# EAGLE board arpie_cv_tab (EAGLE 9.3.0)
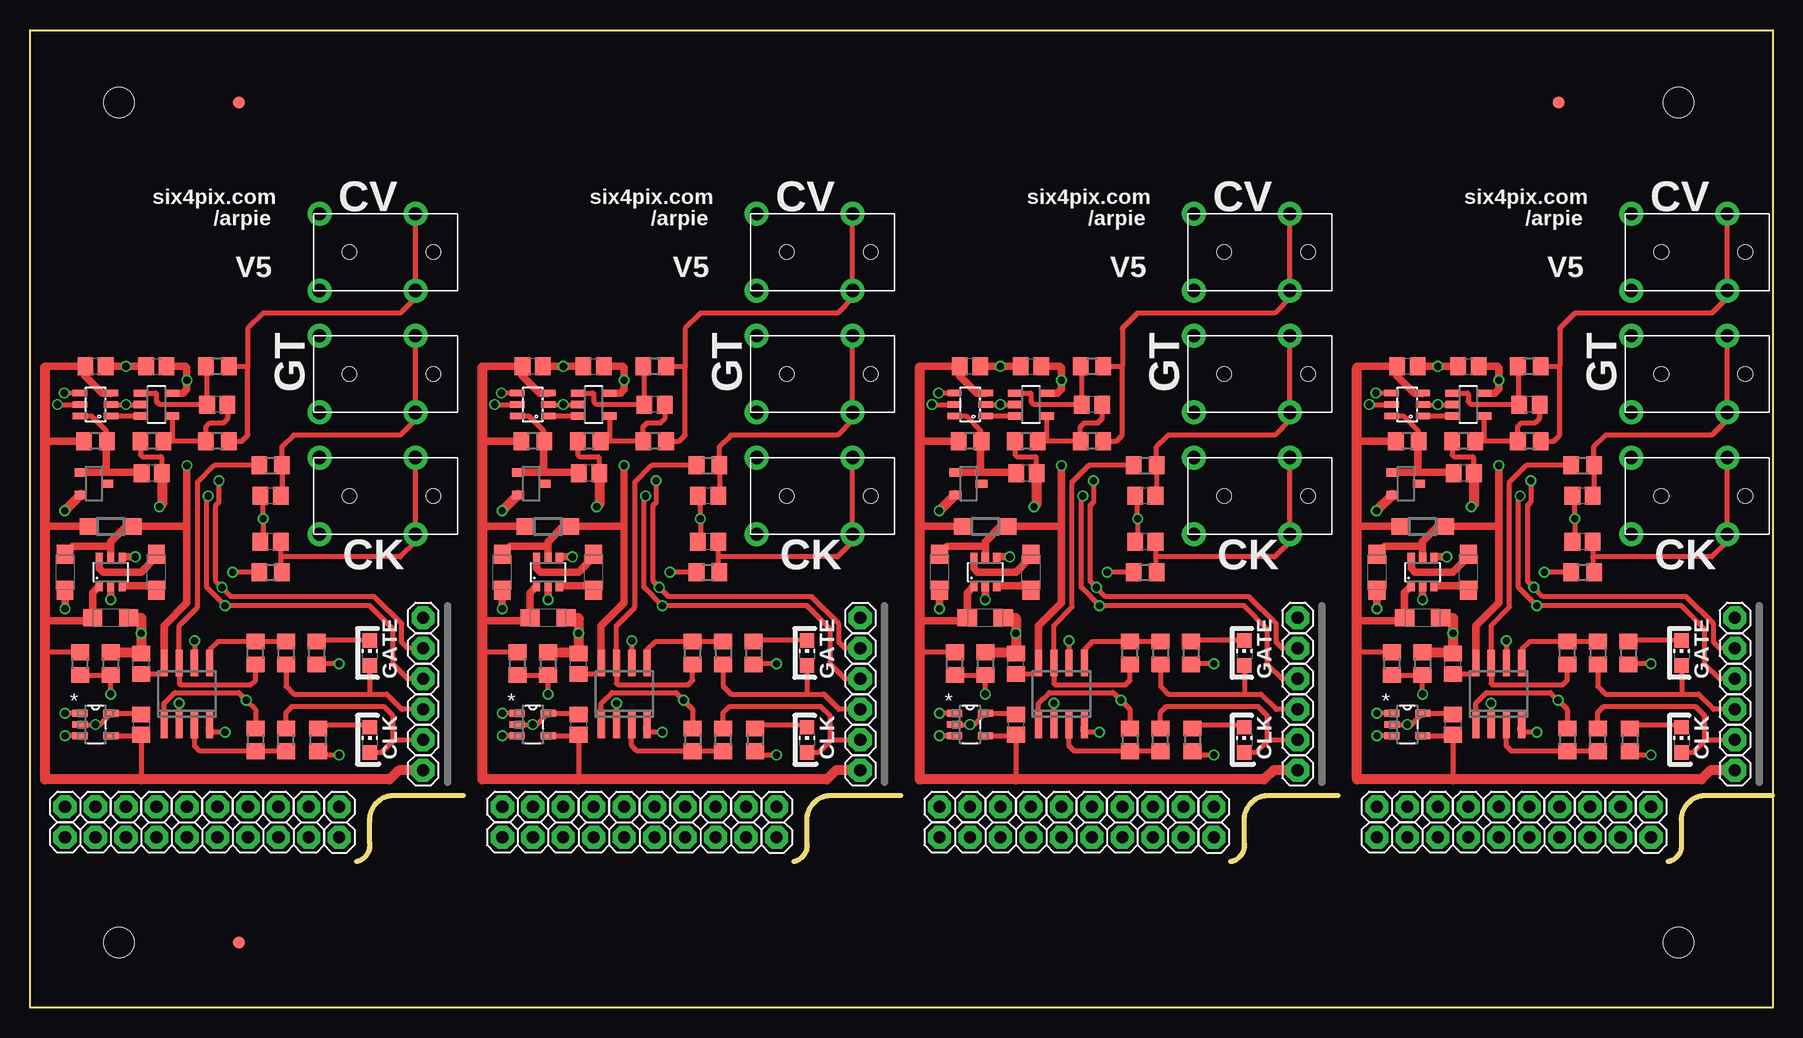
[diagram p0: board, top side]
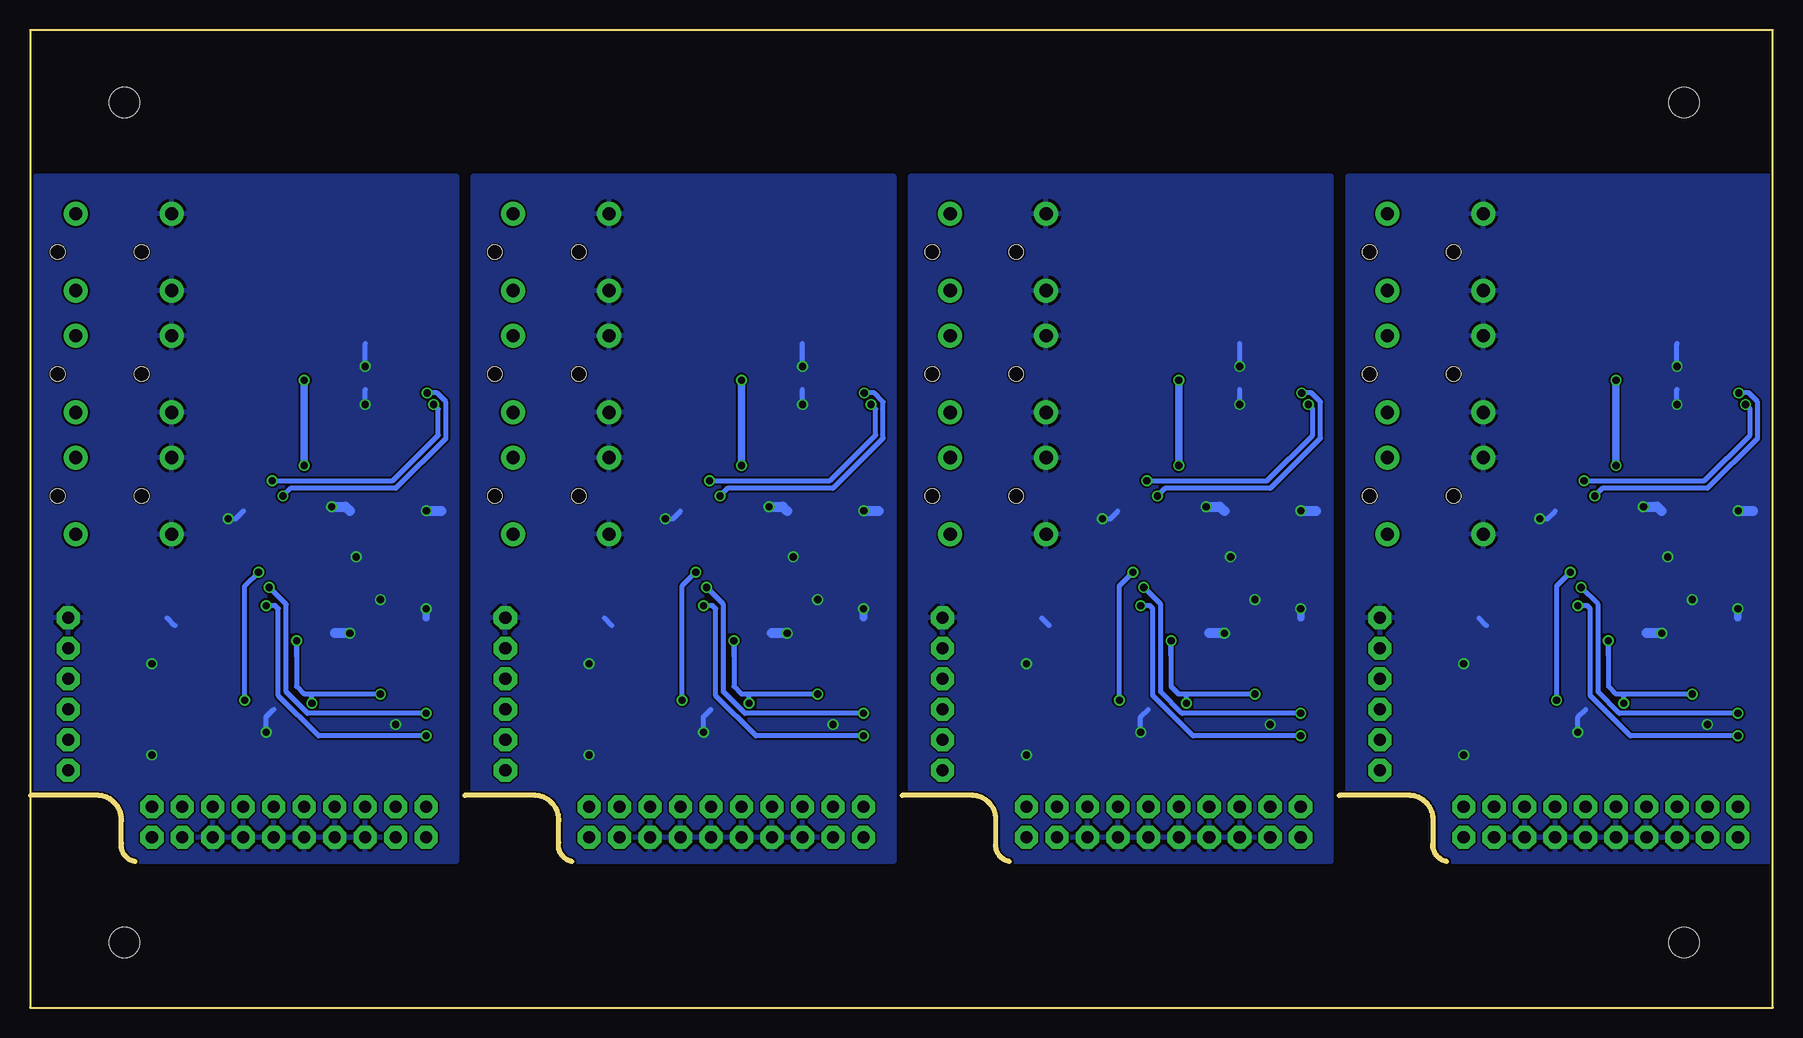
[diagram p1: board, bottom side, seen from below]

Size 145.29 x 81.47 mm. Coordinates in mm from the lower left corner, seen from the top.
Outline: 36.14,17.7 30.25,17.7 arc90 28.32,15.54 28.32,13.76 arc-90 27.2,12.18
Outline: 72.59,17.7 66.7,17.7 arc90 64.77,15.54 64.77,13.76 arc-90 63.65,12.18
Outline: 109.04,17.7 103.15,17.7 arc90 101.22,15.54 101.22,13.76 arc-90 100.1,12.18
Outline: 145.24,17.7 139.6,17.7 arc90 137.67,15.54 137.67,13.76 arc-90 136.55,12.18
Outline: 0,81.47 145.29,81.47 145.29,0 0,0 0,81.47
Copper layers (1*16): Top 0.035mm / dielectric 1.5mm / Bottom 0.035mm
Design rules "hackvana": minimum track width 6mil, minimum drill 0.3mm, track to track 6mil, track to pad 9mil, pad to pad 6mil, via to via 6mil, smd to smd 0mil, copper to edge 6mil, drill to drill 6mil, minimum pad ring 10mil, minimum via ring 6mil, stop-mask expansion 2mil, vias tented up to drill 100mil, thermal gap 10mil
Holes 2.5 mm at 7.42,5.43 137.42,5.43 7.42,75.43 137.42,75.43

## Footprints (pad centres in the part's own frame; a part is rotated, then mirrored left to right if it is on the bottom)
C0805 = smd 1.3 x 1.5: 1 -0.85,0; 2 0.85,0
SMC_A = smd 1.6 x 1.4: + -1.5,0; - 1.5,0
1X01 = drill 1.016 pad 1.93 octagon: 1 0,0
CHIP-LED0805 = smd 1.2 x 1.2: A 0,-1.05; C 0,1.05
3_5MM_PTH_MICRO = drill 1.1 pad 2: 1 3.2,-8; 2 -3.2,0; 2A 3.2,0; 3 -3.2,-8 | hole 1.2: 0,1.5; 0,-5.5
SOD123 = smd 1.4 x 1.4: A 1.9,0; C -1.9,0
FIDUCIAL_1MM = smd 1 x 1: 1 0,0
SOT23-6 = smd 0.55 x 1.2: 1 -0.95,-1.3; 2 0,-1.3; 3 0.95,-1.3; 4 0.95,1.3; 5 0,1.3; 6 -0.95,1.3
SOT23-5 = smd 0.6 x 1.2: 1 -0.95,-1.306; 2 0,-1.306; 3 0.95,-1.306; 4 0.95,1.306; 5 -0.95,1.306
SOT23-6' = smd 0.6 x 0.9: 1 -0.95,-1.15; 2 0,-1.15; 3 0.95,-1.15; 4 0.95,1.15; 5 0,1.15; 6 -0.95,1.15
SO08 = smd 0.6 x 2.2: 1 -1.905,-2.6; 2 -0.635,-2.6; 3 0.635,-2.6; 4 1.905,-2.6; 5 1.905,2.6; 6 0.635,2.6; 7 -0.635,2.6; 8 -1.905,2.6
DBZ_R-PDSO-G3 = smd 0.7 x 1: 1 -0.95,-1.1; 2 0.95,-1.1; 3 0,1.1
SOT95P290X145-5N = smd 1.27 x 0.559: 1 -1.295,0.94; 2 -1.295,0; 3 -1.295,-0.94; 4 1.295,-0.94; 5 1.295,0.94
R0805 = smd 1.3 x 1.5: 1 -0.95,0; 2 0.95,0

## Placement (x,y rotation side)
C1  [C0805]  5.46,53.44 180 top
C2  [C0805]  10.54,53.44 0 top
C3  [C0805]  15.62,50.26 180 top
C4  [C0805]  20.07,42.64 180 top
C5  [C0805]  20.07,38.83 180 top
C6  [SMC_A]  2.92,36.29 270 top
C7  10u  [SMC_A]  6.73,32.48 0 top
C8  10u  [SMC_A]  10.54,36.29 270 top
C9  [C0805]  10.16,44.55 180 top
C10  [C0805]  9.27,28.67 90 top
C11  [C0805]  56.51,38.83 180 top
C12  [C0805]  9.27,23.59 270 top
C13  [C0805]  56.51,42.64 180 top
C14  [C0805]  41.91,53.44 180 top
C15  [C0805]  46.99,53.44 0 top
C16  [C0805]  52.07,50.26 180 top
C17  10u  [SMC_A]  46.99,36.29 270 top
C18  [SMC_A]  39.37,36.29 270 top
C19  10u  [SMC_A]  43.18,32.48 0 top
C20  [C0805]  45.72,28.67 90 top
C21  [C0805]  46.61,44.55 180 top
C22  [C0805]  45.72,23.59 270 top
C23  [C0805]  92.96,38.83 180 top
C24  [C0805]  92.96,42.64 180 top
C25  [C0805]  78.36,53.44 180 top
C26  [C0805]  83.44,53.44 0 top
C27  [C0805]  88.52,50.26 180 top
C28  10u  [SMC_A]  83.44,36.29 270 top
C29  [SMC_A]  75.82,36.29 270 top
C30  10u  [SMC_A]  79.63,32.48 0 top
C31  [C0805]  82.17,28.67 90 top
C32  [C0805]  83.06,44.55 180 top
C33  [C0805]  82.17,23.59 270 top
C34  [C0805]  129.41,38.83 180 top
C35  [C0805]  129.41,42.64 180 top
C36  [C0805]  114.81,53.44 180 top
C37  [C0805]  119.89,53.44 0 top
C38  [C0805]  124.97,50.26 180 top
C39  10u  [SMC_A]  119.89,36.29 270 top
C40  [SMC_A]  112.27,36.29 270 top
C41  10u  [SMC_A]  116.08,32.48 0 top
C42  [C0805]  118.62,28.67 90 top
C43  [C0805]  119.51,44.55 180 top
C44  [C0805]  118.62,23.59 270 top
CLK  [1X01]  2.92,16.73 0 top
CLK1  [1X01]  39.37,16.73 0 top
CLK2  [1X01]  75.82,16.73 0 top
CLK3  [1X01]  112.27,16.73 0 top
CLK_LED  [CHIP-LED0805]  28.32,22.32 0 top
CLK_LED1  [CHIP-LED0805]  64.77,22.32 0 top
CLK_LED2  [CHIP-LED0805]  101.22,22.32 0 top
CLK_LED3  [CHIP-LED0805]  137.67,22.32 0 top
CLKOUT  3_5MM_PTH_MICRO  [3_5MM_PTH_MICRO]  32.13,42.64 270 top
CLKOUT1  3_5MM_PTH_MICRO  [3_5MM_PTH_MICRO]  68.58,42.64 270 top
CLKOUT2  3_5MM_PTH_MICRO  [3_5MM_PTH_MICRO]  105.03,42.64 270 top
CLKOUT3  3_5MM_PTH_MICRO  [3_5MM_PTH_MICRO]  141.48,42.64 270 top
CVOUT  3_5MM_PTH_MICRO  [3_5MM_PTH_MICRO]  32.13,62.96 270 top
CVOUT1  3_5MM_PTH_MICRO  [3_5MM_PTH_MICRO]  68.58,62.96 270 top
CVOUT2  3_5MM_PTH_MICRO  [3_5MM_PTH_MICRO]  105.03,62.96 270 top
CVOUT3  3_5MM_PTH_MICRO  [3_5MM_PTH_MICRO]  141.48,62.96 270 top
D1  MBR0520LT  [SOD123]  6.73,40.1 180 top
D2  MBR0520LT  [SOD123]  43.18,40.1 180 top
D3  MBR0520LT  [SOD123]  79.63,40.1 180 top
D4  MBR0520LT  [SOD123]  116.08,40.1 180 top
DAT  [1X01]  5.46,16.73 0 top
DAT1  [1X01]  41.91,16.73 0 top
DAT2  [1X01]  78.36,16.73 0 top
DAT3  [1X01]  114.81,16.73 0 top
E$1  [FIDUCIAL_1MM]  17.42,75.43 0 top
E$2  [FIDUCIAL_1MM]  127.42,75.43 0 top
E$3  [FIDUCIAL_1MM]  17.42,5.43 0 top
ENA  [1X01]  20.7,16.73 90 top
ENA1  [1X01]  57.15,16.73 90 top
ENA2  [1X01]  93.6,16.73 90 top
ENA3  [1X01]  130.05,16.73 90 top
GATE_LED  [CHIP-LED0805]  28.32,29.56 0 top
GATE_LED1  [CHIP-LED0805]  64.77,29.56 0 top
GATE_LED2  [CHIP-LED0805]  101.22,29.56 0 top
GATE_LED3  [CHIP-LED0805]  137.67,29.56 0 top
GATEOUT  3_5MM_PTH_MICRO  [3_5MM_PTH_MICRO]  32.13,52.8 270 top
GATEOUT1  3_5MM_PTH_MICRO  [3_5MM_PTH_MICRO]  68.58,52.8 270 top
GATEOUT2  3_5MM_PTH_MICRO  [3_5MM_PTH_MICRO]  105.03,52.8 270 top
GATEOUT3  3_5MM_PTH_MICRO  [3_5MM_PTH_MICRO]  141.48,52.8 270 top
GND  [1X01]  32.77,32.48 0 top
GND1  [1X01]  8,14.19 0 top
GND2  [1X01]  10.54,14.19 0 top
GND3  [1X01]  13.08,14.19 0 top
GND4  [1X01]  15.62,14.19 0 top
GND5  [1X01]  18.16,14.19 0 top
GND6  [1X01]  20.7,14.19 0 top
GND7  [1X01]  54.61,14.19 0 top
GND8  [1X01]  57.15,14.19 0 top
GND9  [1X01]  46.99,14.19 0 top
GND10  [1X01]  49.53,14.19 0 top
GND11  [1X01]  52.07,14.19 0 top
GND12  [1X01]  44.45,14.19 0 top
GND13  [1X01]  69.22,32.48 0 top
GND14  [1X01]  91.06,14.19 0 top
GND15  [1X01]  93.6,14.19 0 top
GND16  [1X01]  83.44,14.19 0 top
GND17  [1X01]  85.98,14.19 0 top
GND18  [1X01]  88.52,14.19 0 top
GND19  [1X01]  80.9,14.19 0 top
GND20  [1X01]  105.66,32.48 0 top
GND21  [1X01]  127.51,14.19 0 top
GND22  [1X01]  130.05,14.19 0 top
GND23  [1X01]  119.89,14.19 0 top
GND24  [1X01]  122.43,14.19 0 top
GND25  [1X01]  124.97,14.19 0 top
GND26  [1X01]  117.35,14.19 0 top
GND27  [1X01]  142.11,32.48 0 top
IC1  MCP4726  [SOT23-6]  5.46,50.26 90 top
IC2  MCP601OT  [SOT23-5]  10.54,50.26 270 top
IC3  LM27675M5_CHARGEPUMP  [SOT23-6']  6.73,36.29 0 top
IC4  LM358D  [SO08]  13.08,26.13 0 top
IC5  LM4041A12DBZ  [DBZ_R-PDSO-G3]  5.33,43.66 270 top
IC6  24LC_16BT-I/OT  [SOT95P290X145-5N]  5.46,23.59 0 top
IC7  MCP4726  [SOT23-6]  41.91,50.26 90 top
IC8  MCP601OT  [SOT23-5]  46.99,50.26 270 top
IC9  LM27675M5_CHARGEPUMP  [SOT23-6']  43.18,36.29 0 top
IC10  LM358D  [SO08]  49.53,26.13 0 top
IC11  LM4041A12DBZ  [DBZ_R-PDSO-G3]  41.78,43.66 270 top
IC12  24LC_16BT-I/OT  [SOT95P290X145-5N]  41.91,23.59 0 top
IC13  MCP4726  [SOT23-6]  78.36,50.26 90 top
IC14  MCP601OT  [SOT23-5]  83.44,50.26 270 top
IC15  LM27675M5_CHARGEPUMP  [SOT23-6']  79.63,36.29 0 top
IC16  LM358D  [SO08]  85.98,26.13 0 top
IC17  LM4041A12DBZ  [DBZ_R-PDSO-G3]  78.23,43.66 270 top
IC18  24LC_16BT-I/OT  [SOT95P290X145-5N]  78.36,23.59 0 top
IC19  MCP4726  [SOT23-6]  114.81,50.26 90 top
IC20  MCP601OT  [SOT23-5]  119.89,50.26 270 top
IC21  LM27675M5_CHARGEPUMP  [SOT23-6']  116.08,36.29 0 top
IC22  LM358D  [SO08]  122.43,26.13 0 top
IC23  LM4041A12DBZ  [DBZ_R-PDSO-G3]  114.68,43.66 270 top
IC24  24LC_16BT-I/OT  [SOT95P290X145-5N]  114.81,23.59 0 top
KS1  [1X01]  8,16.73 90 top
KS2  [1X01]  25.78,16.73 90 top
KS3  [1X01]  62.23,16.73 90 top
KS4  [1X01]  44.45,16.73 90 top
KS5  [1X01]  98.68,16.73 90 top
KS6  [1X01]  80.9,16.73 90 top
KS7  [1X01]  135.13,16.73 90 top
KS8  [1X01]  117.35,16.73 90 top
LD1  [1X01]  10.54,16.73 90 top
LD2  [1X01]  13.08,16.73 90 top
LD3  [1X01]  15.62,16.73 90 top
LD4  [1X01]  18.16,16.73 90 top
LD5  [1X01]  52.07,16.73 90 top
LD6  [1X01]  49.53,16.73 90 top
LD7  [1X01]  46.99,16.73 90 top
LD8  [1X01]  54.61,16.73 90 top
LD9  [1X01]  88.52,16.73 90 top
LD10  [1X01]  85.98,16.73 90 top
LD11  [1X01]  83.44,16.73 90 top
LD12  [1X01]  91.06,16.73 90 top
LD13  [1X01]  124.97,16.73 90 top
LD14  [1X01]  122.43,16.73 90 top
LD15  [1X01]  119.89,16.73 90 top
LD16  [1X01]  127.51,16.73 90 top
PB1  [1X01]  69.22,22.32 0 top
PB2  [1X01]  105.66,22.32 0 top
PB3  [1X01]  32.77,22.32 0 top
PB4  [1X01]  142.11,22.32 0 top
PC0  [1X01]  32.77,24.86 0 top
PC1  [1X01]  69.22,29.94 0 top
PC2  [1X01]  69.22,27.4 0 top
PC3  [1X01]  69.22,24.86 0 top
PC4  [1X01]  32.77,27.4 0 top
PC5  [1X01]  32.77,29.94 0 top
PC6  [1X01]  105.66,29.94 0 top
PC7  [1X01]  105.66,27.4 0 top
PC8  [1X01]  105.66,24.86 0 top
PC9  [1X01]  142.11,29.94 0 top
PC10  [1X01]  142.11,27.4 0 top
PC11  [1X01]  142.11,24.86 0 top
R1  [R0805]  15.62,53.44 180 top
R2  [R0805]  10.16,47.21 180 top
R3  [R0805]  15.62,47.21 180 top
R4  1k  [R0805]  20.07,45.18 0 top
R5  1k  [R0805]  20.07,36.29 0 top
R6  47k  [R0805]  4.19,28.67 90 top
R7  47k  [R0805]  6.73,28.67 270 top
R8  2m2  [R0805]  18.8,29.56 90 top
R9  100k  [R0805]  21.34,29.56 270 top
R10  1K  [R0805]  23.88,29.56 270 top
R11  2m2  [R0805]  18.8,22.32 270 top
R12  100k  [R0805]  21.34,22.32 90 top
R13  1K  [R0805]  24,22.32 270 top
R14  3k  [R0805]  5.46,47.21 180 top
R15  1K  [R0805]  60.32,29.56 270 top
R16  1K  [R0805]  60.45,22.32 270 top
R17  1k  [R0805]  56.51,36.29 0 top
R18  1k  [R0805]  56.51,45.18 0 top
R19  [R0805]  52.07,53.44 180 top
R20  [R0805]  52.07,47.21 180 top
R21  [R0805]  46.61,47.21 180 top
R22  47k  [R0805]  43.18,28.67 270 top
R23  47k  [R0805]  40.64,28.67 90 top
R24  100k  [R0805]  57.79,22.32 90 top
R25  100k  [R0805]  57.79,29.56 270 top
R26  2m2  [R0805]  55.24,29.56 90 top
R27  2m2  [R0805]  55.24,22.32 270 top
R28  3k  [R0805]  41.91,47.21 180 top
R29  1K  [R0805]  96.77,29.56 270 top
R30  1K  [R0805]  96.9,22.32 270 top
R31  1k  [R0805]  92.96,36.29 0 top
R32  1k  [R0805]  92.96,45.18 0 top
R33  [R0805]  88.52,53.44 180 top
R34  [R0805]  88.52,47.21 180 top
R35  [R0805]  83.06,47.21 180 top
R36  47k  [R0805]  79.63,28.67 270 top
R37  47k  [R0805]  77.09,28.67 90 top
R38  100k  [R0805]  94.23,22.32 90 top
R39  100k  [R0805]  94.23,29.56 270 top
R40  2m2  [R0805]  91.69,29.56 90 top
R41  2m2  [R0805]  91.69,22.32 270 top
R42  3k  [R0805]  78.36,47.21 180 top
R43  1K  [R0805]  133.22,29.56 270 top
R44  1K  [R0805]  133.35,22.32 270 top
R45  1k  [R0805]  129.41,36.29 0 top
R46  1k  [R0805]  129.41,45.18 0 top
R47  [R0805]  124.97,53.44 180 top
R48  [R0805]  124.97,47.21 180 top
R49  [R0805]  119.51,47.21 180 top
R50  47k  [R0805]  116.08,28.67 270 top
R51  47k  [R0805]  113.54,28.67 90 top
R52  100k  [R0805]  130.68,22.32 90 top
R53  100k  [R0805]  130.68,29.56 270 top
R54  2m2  [R0805]  128.14,29.56 90 top
R55  2m2  [R0805]  128.14,22.32 270 top
R56  3k  [R0805]  114.81,47.21 180 top
SW1  [1X01]  23.24,16.73 90 top
SW2  [1X01]  59.69,16.73 90 top
SW3  [1X01]  96.14,16.73 90 top
SW4  [1X01]  132.59,16.73 90 top
UN1  [1X01]  23.24,14.19 0 top
UN2  [1X01]  25.78,14.19 90 top
UN3  [1X01]  62.23,14.19 90 top
UN4  [1X01]  59.69,14.19 0 top
UN5  [1X01]  98.68,14.19 90 top
UN6  [1X01]  96.14,14.19 0 top
UN7  [1X01]  135.13,14.19 90 top
UN8  [1X01]  132.59,14.19 0 top
VCC  [1X01]  32.77,19.78 0 top
VCC1  [1X01]  2.92,14.19 0 top
VCC2  [1X01]  5.46,14.19 0 top
VCC3  [1X01]  39.37,14.19 0 top
VCC4  [1X01]  41.91,14.19 0 top
VCC5  [1X01]  69.22,19.78 0 top
VCC6  [1X01]  75.82,14.19 0 top
VCC7  [1X01]  78.36,14.19 0 top
VCC8  [1X01]  105.66,19.78 0 top
VCC9  [1X01]  112.27,14.19 0 top
VCC10  [1X01]  114.81,14.19 0 top
VCC11  [1X01]  142.11,19.78 0 top

## Library data of the parts
C1-C5 C9-C16 C20-C27 C31-C38 C42-C44 = resistor
C6-C8 C17-C19 C28-C30 C39-C41 R1-R56 = rcl
CLK CLK1-CLK3 DAT DAT1-DAT3 E$1-E$3 ENA ENA1-ENA3 GND GND1-GND27 KS1-KS8 LD1-LD16 PB1-PB4 PC0 PC1-PC11 SW1-SW4 UN1-UN8 VCC VCC1-VCC11 = adafruit
CLK_LED CLK_LED1-CLK_LED3 GATE_LED GATE_LED1-GATE_LED3 = led
CLKOUT CLKOUT1-CLKOUT3 CVOUT CVOUT1-CVOUT3 GATEOUT GATEOUT1-GATEOUT3 IC3 IC9 IC15 IC21 = jason_eagle6
D1-D4 = diode
IC1 IC7 IC13 IC19 = jasons_stuff
IC2 IC4 IC8 IC10 IC14 IC16 IC20 IC22 = linear
IC5 IC11 IC17 IC23 = texas; MPN: LM4041A12IDBZR; OC_FARNELL: 1407949; OC_NEWARK: 58K5875
IC6 IC12 IC18 IC24 = Microchip-24LCxxx; MPN: 24LC16BT-I/OT; OC_FARNELL: 9757961; OC_NEWARK: 62K0580; PACKAGE: SOT-23-5; SUPPLIER: MICROCHIP

## Nets
+5V: C1.2 C7.+ C12.2 D1.A IC1.3 IC3.1 IC6.4 R6.2 R14.2 VCC.1
+5V1: C14.2 C19.+ C22.2 D2.A IC7.3 IC9.1 IC12.4 R23.2 R28.2 VCC5.1
+5V2: C25.2 C30.+ C33.2 D3.A IC13.3 IC15.1 IC18.4 R37.2 R42.2 VCC8.1
+5V3: C36.2 C41.+ C44.2 D4.A IC19.3 IC21.1 IC24.4 R51.2 R56.2 VCC11.1
+10V: C2.2 C6.+ C10.1 D1.C IC2.5 IC3.5 IC4.8
+10V1: C15.2 C18.+ C20.1 D2.C IC8.5 IC9.5 IC10.8
+10V2: C26.2 C29.+ C31.1 D3.C IC14.5 IC15.5 IC16.8
+10V3: C37.2 C40.+ C42.1 D4.C IC20.5 IC21.5 IC22.8
CLK_OUT: CLK_LED.A PB3.1 R12.2
CLK_OUT1: CLK_LED1.A PB1.1 R24.2
CLK_OUT2: CLK_LED2.A PB2.1 R38.2
CLK_OUT3: CLK_LED3.A PB4.1 R52.2
CVOUT: CVOUT.2 CVOUT.2A R1.1 R3.1
CVOUT1: CVOUT1.2 CVOUT1.2A R19.1 R20.1
CVOUT2: CVOUT2.2 CVOUT2.2A R33.1 R34.1
CVOUT3: CVOUT3.2 CVOUT3.2A R47.1 R48.1
DACOUT: IC1.1 IC2.3
DACOUT1: IC7.1 IC8.3
DACOUT2: IC13.1 IC14.3
DACOUT3: IC19.1 IC20.3
GATE_OUT: GATE_LED.A PC0.1 R9.2
GATE_OUT1: GATE_LED1.A PC3.1 R25.2
GATE_OUT2: GATE_LED2.A PC8.1 R39.2
GATE_OUT3: GATE_LED3.A PC11.1 R53.2
GND: C1.1 C2.1 C4.2 C5.2 C6.- C7.- C9.1 C10.2 C12.1 CLKOUT.1 CLKOUT.3 CVOUT.1 CVOUT.3 GATEOUT.1 GATEOUT.3 GND1.1 GND2.1 GND3.1 GND4.1 GND5.1 GND6.1 GND.1 IC1.2 IC2.2 IC3.2 IC3.4 IC4.4 IC5.2 IC6.2 IC6.5 R2.2 R7.1 R10.2 R13.2
GND1: C11.2 C13.2 C14.1 C15.1 C18.- C19.- C20.2 C21.1 C22.1 CLKOUT1.1 CLKOUT1.3 CVOUT1.1 CVOUT1.3 GATEOUT1.1 GATEOUT1.3 GND7.1 GND8.1 GND9.1 GND10.1 GND11.1 GND12.1 GND13.1 IC7.2 IC8.2 IC9.2 IC9.4 IC10.4 IC11.2 IC12.2 IC12.5 R15.2 R16.2 R21.2 R22.1
GND2: C23.2 C24.2 C25.1 C26.1 C29.- C30.- C31.2 C32.1 C33.1 CLKOUT2.1 CLKOUT2.3 CVOUT2.1 CVOUT2.3 GATEOUT2.1 GATEOUT2.3 GND14.1 GND15.1 GND16.1 GND17.1 GND18.1 GND19.1 GND20.1 IC13.2 IC14.2 IC15.2 IC15.4 IC16.4 IC17.2 IC18.2 IC18.5 R29.2 R30.2 R35.2 R36.1
GND3: C34.2 C35.2 C36.1 C37.1 C40.- C41.- C42.2 C43.1 C44.1 CLKOUT3.1 CLKOUT3.3 CVOUT3.1 CVOUT3.3 GATEOUT3.1 GATEOUT3.3 GND21.1 GND22.1 GND23.1 GND24.1 GND25.1 GND26.1 GND27.1 IC19.2 IC20.2 IC21.2 IC21.4 IC22.4 IC23.2 IC24.2 IC24.5 R43.2 R44.2 R49.2 R50.1
N$1: IC4.2 IC4.6 R6.1 R7.2
N$2: CLK_LED.C R13.1
N$3: GATE_LED.C R10.1
N$4: IC4.3 R11.2 R12.1
N$5: IC4.5 R8.2 R9.1
N$6: C9.2 IC1.6 IC5.1 R14.1
N$7: C11.1 CLKOUT1.2 CLKOUT1.2A R17.2
N$8: C13.1 GATEOUT1.2 GATEOUT1.2A R18.2
N$9: IC4.1 R5.1 R11.1
N$10: IC10.7 R18.1 R26.1
N$11: C3.2 IC2.1 R1.2
N$12: IC4.7 R4.1 R8.1
N$13: IC10.1 R17.1 R27.1
N$14: C16.2 IC8.1 R19.2
N$15: C3.1 IC2.4 R2.1 R3.2
N$16: C16.1 IC8.4 R20.2 R21.1
N$17: C17.+ IC9.6
N$18: C17.- IC9.3
N$19: C5.1 CLKOUT.2 CLKOUT.2A R5.2
N$20: C4.1 GATEOUT.2 GATEOUT.2A R4.2
N$21: IC10.2 IC10.6 R22.2 R23.1
N$22: CLK_LED1.C R16.1
N$23: GATE_LED1.C R15.1
N$24: IC10.3 R24.1 R27.2
N$25: IC10.5 R25.1 R26.2
N$26: C21.2 IC7.6 IC11.1 R28.1
N$27: C23.1 CLKOUT2.2 CLKOUT2.2A R31.2
N$28: C24.1 GATEOUT2.2 GATEOUT2.2A R32.2
N$29: IC16.7 R32.1 R40.1
N$30: IC16.1 R31.1 R41.1
N$31: C27.2 IC14.1 R33.2
N$32: C27.1 IC14.4 R34.2 R35.1
N$33: C28.+ IC15.6
N$34: C28.- IC15.3
N$35: IC16.2 IC16.6 R36.2 R37.1
N$36: CLK_LED2.C R30.1
N$37: GATE_LED2.C R29.1
N$38: C8.+ IC3.6
N$39: C8.- IC3.3
N$40: IC16.3 R38.1 R41.2
N$41: IC16.5 R39.1 R40.2
N$42: C32.2 IC13.6 IC17.1 R42.1
N$43: C34.1 CLKOUT3.2 CLKOUT3.2A R45.2
N$44: C35.1 GATEOUT3.2 GATEOUT3.2A R46.2
N$45: IC22.7 R46.1 R54.1
N$46: IC22.1 R45.1 R55.1
N$47: C38.2 IC20.1 R47.2
N$48: C38.1 IC20.4 R48.2 R49.1
N$49: C39.+ IC21.6
N$50: C39.- IC21.3
N$51: IC22.2 IC22.6 R50.2 R51.1
N$52: CLK_LED3.C R44.1
N$53: GATE_LED3.C R43.1
N$54: IC22.3 R52.1 R55.2
N$55: IC22.5 R53.1 R54.2
N$56: C43.2 IC19.6 IC23.1 R56.1
SCL: IC1.5 IC6.1 PC5.1
SCL1: IC7.5 IC12.1 PC1.1
SCL2: IC13.5 IC18.1 PC6.1
SCL3: IC19.5 IC24.1 PC9.1
SDA: IC1.4 IC6.3 PC4.1
SDA1: IC7.4 IC12.3 PC2.1
SDA2: IC13.4 IC18.3 PC7.1
SDA3: IC19.4 IC24.3 PC10.1

## Tracks (layer width: path | path; a pad name or v marks a point on that pad's centre or on a via)
+5V
  Top 0.406: R6.2 1.27,29.62 1.27,29.94 | IC6.4 9.27,22.65 C12.2 9.27,19.02
  Top 0.61: IC3.1 5.23,34.59 C7.+ 5.23,32.25 1.5,32.25 1.27,32.48 | D1.A 1.27,40.1 | 1.27,47.09 1.4,47.21 R14.2 4.57,47.27 | IC1.3 6.04,51.21 4.57,52.67 4.57,53.4 C1.2 1.37,53.44 1.27,53.33
  Top 0.813: VCC.1 30.73,19.78 29.97,19.02 9.27,19.02 1.27,19.02 1.27,29.94 1.27,32.48 1.27,40.1 1.27,47.09 1.27,53.33
+5V1
  Top 0.406: R23.2 37.72,29.62 37.72,29.94 | IC12.4 45.72,22.65 C22.2 45.72,19.02
  Top 0.61: IC9.1 41.68,34.59 C19.+ 41.68,32.25 37.95,32.25 37.72,32.48 | D2.A 37.72,40.1 | 37.72,47.09 37.85,47.21 R28.2 41.02,47.27 | IC7.3 42.48,51.21 41.02,52.67 41.02,53.4 C14.2 37.82,53.44 37.72,53.33
  Top 0.813: VCC5.1 67.18,19.78 66.42,19.02 45.72,19.02 37.72,19.02 37.72,29.94 37.72,32.48 37.72,40.1 37.72,47.09 37.72,53.33
+5V2
  Top 0.406: R37.2 74.17,29.62 74.17,29.94 | IC18.4 82.17,22.65 C33.2 82.17,19.02
  Top 0.61: IC15.1 78.13,34.59 C30.+ 78.13,32.25 74.4,32.25 74.17,32.48 | D3.A 74.17,40.1 | 74.17,47.09 74.29,47.21 R42.2 77.47,47.27 | IC13.3 78.93,51.21 77.47,52.67 77.47,53.4 C25.2 74.27,53.44 74.17,53.33
  Top 0.813: VCC8.1 103.63,19.78 102.87,19.02 82.17,19.02 74.17,19.02 74.17,29.94 74.17,32.48 74.17,40.1 74.17,47.09 74.17,53.33
+5V3
  Top 0.406: R51.2 110.62,29.62 110.62,29.94 | IC24.4 118.62,22.65 C44.2 118.62,19.02
  Top 0.61: IC21.1 114.58,34.59 C41.+ 114.58,32.25 110.85,32.25 110.62,32.48 | D4.A 110.62,40.1 | 110.62,47.09 110.74,47.21 R56.2 113.92,47.27 | IC19.3 115.38,51.21 113.92,52.67 113.92,53.4 C36.2 110.72,53.44 110.62,53.33
  Top 0.813: VCC11.1 140.08,19.78 139.32,19.02 118.62,19.02 110.62,19.02 110.62,29.94 110.62,32.48 110.62,40.1 110.62,47.09 110.62,53.33
+10V  (via drill 0.6)
  Top 0.406: C10.1 11.09,27.82 11.18,27.91 IC4.8
  Top 0.61: IC3.5 6.73,38.32 | 6.73,38.32 6.6,38.45 3.58,38.45 C6.+ | 6.73,38.32 6.73,38.83 8,40.1 D1.C 13.08,40.1 | 13.08,40.1 13.08,33.75 11.18,31.84 IC4.8 | 13.08,40.1 v13.08,45.18 | C2.2 12.95,53.44 13.08,53.31 13.08,52.8 v13.08,52.29 13.08,51.53 12.76,51.21 IC2.5
  Bottom 0.61: v13.08,45.18 v13.08,52.29
+10V1  (via drill 0.6)
  Top 0.406: C20.1 47.54,27.82 47.62,27.91 IC10.8
  Top 0.61: IC9.5 43.18,38.32 | 43.18,38.32 43.05,38.45 40.03,38.45 C18.+ | 43.18,38.32 43.18,38.83 44.45,40.1 D2.C 49.53,40.1 | 49.53,40.1 49.53,33.75 47.62,31.84 IC10.8 | 49.53,40.1 v49.53,45.18 | C15.2 49.4,53.44 49.53,53.31 49.53,52.8 v49.53,52.29 49.53,51.53 49.21,51.21 IC8.5
  Bottom 0.61: v49.53,45.18 v49.53,52.29
+10V2  (via drill 0.6)
  Top 0.406: C31.1 83.99,27.82 84.07,27.91 IC16.8
  Top 0.61: IC15.5 79.63,38.32 | 79.63,38.32 79.5,38.45 76.48,38.45 C29.+ | 79.63,38.32 79.63,38.83 80.9,40.1 D3.C 85.98,40.1 | 85.98,40.1 85.98,33.75 84.07,31.84 IC16.8 | 85.98,40.1 v85.98,45.18 | C26.2 85.85,53.44 85.98,53.31 85.98,52.8 v85.98,52.29 85.98,51.53 85.66,51.21 IC14.5
  Bottom 0.61: v85.98,45.18 v85.98,52.29
+10V3  (via drill 0.6)
  Top 0.406: C42.1 120.44,27.82 120.52,27.91 IC22.8
  Top 0.61: IC21.5 116.08,38.32 | 116.08,38.32 115.95,38.45 112.93,38.45 C40.+ | 116.08,38.32 116.08,38.83 117.35,40.1 D4.C 122.43,40.1 | 122.43,40.1 122.43,33.75 120.52,31.84 IC22.8 | 122.43,40.1 v122.43,45.18 | C37.2 122.3,53.44 122.43,53.31 122.43,52.8 v122.43,52.29 122.43,51.53 122.11,51.21 IC20.5
  Bottom 0.61: v122.43,45.18 v122.43,52.29
CLK_OUT
  Top 0.406: R12.2 21.34,24.61 21.84,25.11 29.46,25.11 30.23,24.35 30.23,22.32 30.35,22.32 | 30.35,22.32 PB3.1 | 30.35,22.32 29.3,21.27 CLK_LED.A
CLK_OUT1
  Top 0.406: R24.2 57.79,24.61 58.29,25.11 65.91,25.11 66.68,24.35 66.68,22.32 66.8,22.32 | 66.8,22.32 PB1.1 | 66.8,22.32 65.75,21.27 CLK_LED1.A
CLK_OUT2
  Top 0.406: R38.2 94.23,24.61 94.74,25.11 102.36,25.11 103.12,24.35 103.12,22.32 103.25,22.32 | 103.25,22.32 PB2.1 | 103.25,22.32 102.2,21.27 CLK_LED2.A
CLK_OUT3
  Top 0.406: R52.2 130.68,24.61 131.19,25.11 138.81,25.11 139.57,24.35 139.57,22.32 139.7,22.32 | 139.7,22.32 PB4.1 | 139.7,22.32 138.65,21.27 CLK_LED3.A
CVOUT
  Top 0.406: 18.16,53.44 18.16,47.72 17.65,47.21 R3.1 | R1.1 18.16,53.44 | 18.16,53.44 18.16,56.61 19.43,57.88 30.86,57.88 32.13,59.15 CVOUT.2A CVOUT.2
CVOUT1
  Top 0.406: 54.61,53.44 54.61,47.72 54.1,47.21 R20.1 | R19.1 54.61,53.44 | 54.61,53.44 54.61,56.61 55.88,57.88 67.31,57.88 68.58,59.15 CVOUT1.2A CVOUT1.2
CVOUT2
  Top 0.406: 91.06,53.44 91.06,47.72 90.55,47.21 R34.1 | R33.1 91.06,53.44 | 91.06,53.44 91.06,56.61 92.33,57.88 103.76,57.88 105.03,59.15 CVOUT2.2A CVOUT2.2
CVOUT3
  Top 0.406: 127.51,53.44 127.51,47.72 127,47.21 R48.1 | R47.1 127.51,53.44 | 127.51,53.44 127.51,56.61 128.78,57.88 140.21,57.88 141.48,59.15 CVOUT3.2A CVOUT3.2
DACOUT
  Top 0.406: IC1.1 IC2.3
DACOUT1
  Top 0.406: IC7.1 IC8.3
DACOUT2
  Top 0.406: IC13.1 IC14.3
DACOUT3
  Top 0.406: IC19.1 IC20.3
GATE_OUT
  Top 0.406: R9.2 21.34,26.77 21.97,26.13 28.32,26.13 | 28.32,26.13 29.72,26.13 30.99,24.86 PC0.1 | GATE_LED.A 28.32,26.13
GATE_OUT1
  Top 0.406: R25.2 57.79,26.77 58.42,26.13 64.77,26.13 | 64.77,26.13 66.17,26.13 67.44,24.86 PC3.1 | GATE_LED1.A 64.77,26.13
GATE_OUT2
  Top 0.406: R39.2 94.23,26.77 94.87,26.13 101.22,26.13 | 101.22,26.13 102.62,26.13 103.89,24.86 PC8.1 | GATE_LED2.A 101.22,26.13
GATE_OUT3
  Top 0.406: R53.2 130.68,26.77 131.32,26.13 137.67,26.13 | 137.67,26.13 139.06,26.13 140.33,24.86 PC11.1 | GATE_LED3.A 137.67,26.13
GND  (via drill 0.6)
  Top 0.406: 24.19,21.37 R13.2 24.32,21.05 v25.78,21.05 | IC2.2 v8,50.26 IC1.2 | v16.26,22.95 14.99,22.95 14.86,23.08 14.86,23.4 IC4.4 | R2.2 9.21,46.05 9.35,45.92 10.92,45.92 10.97,45.87 10.97,44.58 C9.1 | C12.1 9.27,24.53 IC6.5 5.82,23.59 v5.46,23.59 IC6.2 | v25.78,28.67 23.94,28.67 R10.2 | C5.2 19.43,39.05 v19.43,40.73 19.43,42.42 C4.2
  Top 0.61: IC3.2 v6.73,34 | 8,32.48 C7.- | C6.- v2.92,33.24 | v8.76,37.56 7.8,37.56 IC3.4 | C2.1 v8,53.44 C1.1
  Top 0.813: R7.1 9.17,29.62 C10.2 v9.27,31.21 9.27,32.48 C7.- | IC5.2 4.21,42.71 v2.9,41.39 | C9.1 11.01,41.97 v10.79,41.75
  Bottom 0.406: v19.43,40.73 18.8,40.73 18.16,41.37 | 23.88,31.84 24.51,32.48 | v16.26,22.95 16.26,24.23 15.62,24.86 | v8,50.26 8,51.53 | v8,53.44 8,55.34
  Bottom 0.61: v2.92,33.24 2.92,32.48
  Bottom 0.813: v9.27,31.21 10.54,31.21 | v2.9,41.39 1.68,41.39 1.65,41.37 | v10.79,41.75 9.65,41.75 9.27,41.37
  pour Bottom: 0.38,69.31 0.38,12.16 35.43,12.16 35.43,69.31
GND1  (via drill 0.6)
  Top 0.406: 60.64,21.37 R16.2 60.77,21.05 v62.23,21.05 | IC8.2 v44.45,50.26 IC7.2 | v52.71,22.95 51.43,22.95 51.31,23.08 51.31,23.4 IC10.4 | R21.2 45.66,46.05 45.8,45.92 47.37,45.92 47.42,45.87 47.42,44.58 C21.1 | C22.1 45.72,24.53 IC12.5 42.27,23.59 v41.91,23.59 IC12.2 | v62.23,28.67 60.39,28.67 R15.2 | C11.2 55.88,39.05 v55.88,40.73 55.88,42.42 C13.2
  Top 0.61: IC9.2 v43.18,34 | 44.45,32.48 C19.- | C18.- v39.37,33.24 | v45.21,37.56 44.25,37.56 IC9.4 | C15.1 v44.45,53.44 C14.1
  Top 0.813: R22.1 45.62,29.62 C20.2 v45.72,31.21 45.72,32.48 C19.- | IC11.2 40.65,42.71 v39.35,41.39 | C21.1 47.46,41.97 v47.24,41.75
  Bottom 0.406: v55.88,40.73 55.24,40.73 54.61,41.37 | 60.32,31.84 60.96,32.48 | v52.71,22.95 52.71,24.23 52.07,24.86 | v44.45,50.26 44.45,51.53 | v44.45,53.44 44.45,55.34
  Bottom 0.61: v39.37,33.24 39.37,32.48
  Bottom 0.813: v45.72,31.21 46.99,31.21 | v39.35,41.39 38.12,41.39 38.1,41.37 | v47.24,41.75 46.1,41.75 45.72,41.37
  pour Bottom: 36.83,69.31 36.83,12.16 71.88,12.16 71.88,69.31
GND2  (via drill 0.6)
  Top 0.406: 97.09,21.37 R30.2 97.22,21.05 v98.68,21.05 | IC14.2 v80.9,50.26 IC13.2 | v89.15,22.95 87.88,22.95 87.76,23.08 87.76,23.4 IC16.4 | R35.2 82.11,46.05 82.25,45.92 83.82,45.92 83.87,45.87 83.87,44.58 C32.1 | C33.1 82.17,24.53 IC18.5 78.72,23.59 v78.36,23.59 IC18.2 | v98.68,28.67 96.83,28.67 R29.2 | C23.2 92.33,39.05 v92.33,40.73 92.33,42.42 C24.2
  Top 0.61: IC15.2 v79.63,34 | 80.9,32.48 C30.- | C29.- v75.82,33.24 | v81.66,37.56 80.7,37.56 IC15.4 | C26.1 v80.9,53.44 C25.1
  Top 0.813: R36.1 82.07,29.62 C31.2 v82.17,31.21 82.17,32.48 C30.- | IC17.2 77.1,42.71 v75.79,41.39 | C32.1 83.91,41.97 v83.69,41.75
  Bottom 0.406: v92.33,40.73 91.69,40.73 91.06,41.37 | 96.77,31.84 97.41,32.48 | v89.15,22.95 89.15,24.23 88.52,24.86 | v80.9,50.26 80.9,51.53 | v80.9,53.44 80.9,55.34
  Bottom 0.61: v75.82,33.24 75.82,32.48
  Bottom 0.813: v82.17,31.21 83.44,31.21 | v75.79,41.39 74.57,41.39 74.55,41.37 | v83.69,41.75 82.55,41.75 82.17,41.37
  pour Bottom: 73.28,69.31 73.28,12.16 108.33,12.16 108.33,69.31
GND3  (via drill 0.6)
  Top 0.406: 133.54,21.37 R44.2 133.67,21.05 v135.13,21.05 | IC20.2 v117.35,50.26 IC19.2 | v125.6,22.95 124.33,22.95 124.21,23.08 124.21,23.4 IC22.4 | R49.2 118.56,46.05 118.69,45.92 120.27,45.92 120.32,45.87 120.32,44.58 C43.1 | C44.1 118.62,24.53 IC24.5 115.16,23.59 v114.81,23.59 IC24.2 | v135.13,28.67 133.28,28.67 R43.2 | C34.2 128.78,39.05 v128.78,40.73 128.78,42.42 C35.2
  Top 0.61: IC21.2 v116.08,34 | 117.35,32.48 C41.- | C40.- v112.27,33.24 | v118.11,37.56 117.15,37.56 IC21.4 | C37.1 v117.35,53.44 C36.1
  Top 0.813: R50.1 118.52,29.62 C42.2 v118.62,31.21 118.62,32.48 C41.- | IC23.2 113.55,42.71 v112.24,41.39 | C43.1 120.36,41.97 v120.14,41.75
  Bottom 0.406: v128.78,40.73 128.14,40.73 127.51,41.37 | 133.22,31.84 133.86,32.48 | v125.6,22.95 125.6,24.23 124.97,24.86 | v117.35,50.26 117.35,51.53 | v117.35,53.44 117.35,55.34
  Bottom 0.61: v112.27,33.24 112.27,32.48
  Bottom 0.813: v118.62,31.21 119.89,31.21 | v112.24,41.39 111.02,41.39 111,41.37 | v120.14,41.75 119,41.75 118.62,41.37
  pour Bottom: 109.73,69.31 109.73,12.16 144.78,12.16 144.78,69.31
N$1  (via drill 0.6)
  Top 0.406: v13.72,30.57 IC4.6 | R6.1 R7.2 v6.73,26.13 | IC4.2 v12.45,25.37
  Bottom 0.406: 13.72,29.3 v13.72,30.57 13.72,26.77 13.08,26.13 12.45,26.13 | v6.73,26.13 12.45,26.13 | v12.45,25.37 12.45,26.13
N$2
  Top 0.406: R13.1 24.32,23.59 28.1,23.59 CLK_LED.C
N$3
  Top 0.406: GATE_LED.C 23.98,30.61 R10.1
N$4
  Top 0.406: R12.1 R11.2 14.16,21.37 13.72,21.81 IC4.3
N$5
  Top 0.406: R9.1 R8.2 15.68,30.51 14.99,29.81 IC4.5
N$6
  Top 0.406: IC1.6 5.12,49.31 6.35,48.08 6.35,47.27 R14.1
  Top 0.61: IC5.1 6.22,44.61 | 6.22,44.61 9.25,44.61 C9.2 | 6.35,47.27 6.35,44.73 6.22,44.61
N$7
  Top 0.406: C11.1 57.37,37.56 | 57.37,37.56 57.37,36.39 R17.2 | 57.37,37.56 67.31,37.56 68.58,38.83 CLKOUT1.2A CLKOUT1.2
N$8
  Top 0.406: C13.1 57.46,42.74 R18.2 57.46,46.77 58.42,47.72 67.31,47.72 68.58,48.99 GATEOUT1.2A GATEOUT1.2
N$9  (via drill 0.6)
  Top 0.406: IC4.1 11.18,25.37 12.07,26.26 17.4,26.26 v18.03,25.62 18.8,24.86 R11.1 | R5.1 v16.89,36.29
  Bottom 0.406: v18.03,25.62 18.03,35.15 v16.89,36.29
N$10
  Top 0.406: R26.1 55.24,27.27 54.86,26.89 49.02,26.89 48.9,27.02 IC10.7 48.9,31.84 50.42,33.37 50.42,43.78 51.82,45.18 R18.1
N$11
  Top 0.406: IC2.1 10.48,51.21 10.54,51.15 10.54,50.51 10.79,50.26 C3.2 14.77,53.34 R1.2
N$12
  Top 0.406: R8.1 18.8,27.27 18.41,26.89 12.57,26.89 12.45,27.02 IC4.7 12.45,31.84 13.97,33.37 13.97,43.78 15.37,45.18 R4.1
N$13  (via drill 0.6)
  Top 0.406: IC10.1 47.62,25.37 48.51,26.26 53.85,26.26 v54.48,25.62 55.24,24.86 R27.1 | R17.1 v53.34,36.29
  Bottom 0.406: v54.48,25.62 54.48,35.15 v53.34,36.29
N$14
  Top 0.406: IC8.1 46.93,51.21 46.99,51.15 46.99,50.51 47.24,50.26 C16.2 51.22,53.34 R19.2
N$15
  Top 0.406: IC2.4 11.85,47.25 | R2.1 11.81,47.21 11.85,47.25 | 11.85,47.25 14.63,47.25 R3.2 14.67,48.42 14.99,48.74 16.13,48.74 16.47,49.08 C3.1
N$16
  Top 0.406: IC8.4 48.3,47.25 | R21.1 48.26,47.21 48.3,47.25 | 48.3,47.25 51.08,47.25 R20.2 51.12,48.42 51.43,48.74 52.58,48.74 52.92,49.08 C16.1
N$17
  Top 0.61: C17.+ 46.99,37.56 45.72,36.29 42.54,36.29 42.23,36.61 IC9.6
N$18
  Top 0.61: IC9.3 46.64,35.14 C17.-
N$19
  Top 0.406: C5.1 20.92,37.56 | 20.92,37.56 20.92,36.39 R5.2 | 20.92,37.56 30.86,37.56 32.13,38.83 CLKOUT.2A CLKOUT.2
N$20
  Top 0.406: C4.1 21.02,42.74 R4.2 21.02,46.77 21.97,47.72 30.86,47.72 32.13,48.99 GATEOUT.2A GATEOUT.2
N$21  (via drill 0.6)
  Top 0.406: v50.16,30.57 IC10.6 | R23.1 R22.2 v43.18,26.13 | IC10.2 v48.9,25.37
  Bottom 0.406: 50.16,29.3 v50.16,30.57 50.16,26.77 49.53,26.13 48.9,26.13 | v43.18,26.13 48.9,26.13 | v48.9,25.37 48.9,26.13
N$22
  Top 0.406: R16.1 60.77,23.59 64.55,23.59 CLK_LED1.C
N$23
  Top 0.406: GATE_LED1.C 60.43,30.61 R15.1
N$24
  Top 0.406: R24.1 R27.2 50.61,21.37 50.16,21.81 IC10.3
N$25
  Top 0.406: R25.1 R26.2 52.13,30.51 51.43,29.81 IC10.5
N$26
  Top 0.406: IC7.6 41.57,49.31 42.8,48.08 42.8,47.27 R28.1
  Top 0.61: IC11.1 42.67,44.61 | 42.67,44.61 45.7,44.61 C21.2 | 42.8,47.27 42.8,44.73 42.67,44.61
N$27
  Top 0.406: C23.1 93.81,37.56 | 93.81,37.56 93.81,36.39 R31.2 | 93.81,37.56 103.76,37.56 105.03,38.83 CLKOUT2.2A CLKOUT2.2
N$28
  Top 0.406: C24.1 93.91,42.74 R32.2 93.91,46.77 94.87,47.72 103.76,47.72 105.03,48.99 GATEOUT2.2A GATEOUT2.2
N$29
  Top 0.406: R40.1 91.69,27.27 91.31,26.89 85.47,26.89 85.34,27.02 IC16.7 85.34,31.84 86.87,33.37 86.87,43.78 88.26,45.18 R32.1
N$30  (via drill 0.6)
  Top 0.406: IC16.1 84.07,25.37 84.96,26.26 90.3,26.26 v90.93,25.62 91.69,24.86 R41.1 | R31.1 v89.79,36.29
  Bottom 0.406: v90.93,25.62 90.93,35.15 v89.79,36.29
N$31
  Top 0.406: IC14.1 83.38,51.21 83.44,51.15 83.44,50.51 83.69,50.26 C27.2 87.67,53.34 R33.2
N$32
  Top 0.406: IC14.4 84.75,47.25 | R35.1 84.71,47.21 84.75,47.25 | 84.75,47.25 87.53,47.25 R34.2 87.57,48.42 87.88,48.74 89.03,48.74 89.37,49.08 C27.1
N$33
  Top 0.61: C28.+ 83.44,37.56 82.17,36.29 78.99,36.29 78.68,36.61 IC15.6
N$34
  Top 0.61: IC15.3 83.09,35.14 C28.-
N$35  (via drill 0.6)
  Top 0.406: v86.61,30.57 IC16.6 | R37.1 R36.2 v79.63,26.13 | IC16.2 v85.34,25.37
  Bottom 0.406: 86.61,29.3 v86.61,30.57 86.61,26.77 85.98,26.13 85.34,26.13 | v79.63,26.13 85.34,26.13 | v85.34,25.37 85.34,26.13
N$36
  Top 0.406: R30.1 97.22,23.59 101,23.59 CLK_LED2.C
N$37
  Top 0.406: GATE_LED2.C 96.87,30.61 R29.1
N$38
  Top 0.61: C8.+ 10.54,37.56 9.27,36.29 6.1,36.29 5.78,36.61 IC3.6
N$39
  Top 0.61: IC3.3 10.19,35.14 C8.-
N$40
  Top 0.406: R38.1 R41.2 87.06,21.37 86.61,21.81 IC16.3
N$41
  Top 0.406: R39.1 R40.2 88.58,30.51 87.88,29.81 IC16.5
N$42
  Top 0.406: IC13.6 78.01,49.31 79.25,48.08 79.25,47.27 R42.1
  Top 0.61: IC17.1 79.12,44.61 | 79.12,44.61 82.15,44.61 C32.2 | 79.25,47.27 79.25,44.73 79.12,44.61
N$43
  Top 0.406: C34.1 130.26,37.56 | 130.26,37.56 130.26,36.39 R45.2 | 130.26,37.56 140.21,37.56 141.48,38.83 CLKOUT3.2A CLKOUT3.2
N$44
  Top 0.406: C35.1 130.36,42.74 R46.2 130.36,46.77 131.32,47.72 140.21,47.72 141.48,48.99 GATEOUT3.2A GATEOUT3.2
N$45
  Top 0.406: R54.1 128.14,27.27 127.76,26.89 121.92,26.89 121.79,27.02 IC22.7 121.79,31.84 123.32,33.37 123.32,43.78 124.71,45.18 R46.1
N$46  (via drill 0.6)
  Top 0.406: IC22.1 120.52,25.37 121.41,26.26 126.75,26.26 v127.38,25.62 128.14,24.86 R55.1 | R45.1 v126.24,36.29
  Bottom 0.406: v127.38,25.62 127.38,35.15 v126.24,36.29
N$47
  Top 0.406: IC20.1 119.83,51.21 119.89,51.15 119.89,50.51 120.14,50.26 C38.2 124.12,53.34 R47.2
N$48
  Top 0.406: IC20.4 121.19,47.25 | R49.1 121.16,47.21 121.19,47.25 | 121.19,47.25 123.98,47.25 R48.2 124.02,48.42 124.33,48.74 125.48,48.74 125.82,49.08 C38.1
N$49
  Top 0.61: C39.+ 119.89,37.56 118.62,36.29 115.44,36.29 115.13,36.61 IC21.6
N$50
  Top 0.61: IC21.3 119.54,35.14 C39.-
N$51  (via drill 0.6)
  Top 0.406: v123.06,30.57 IC22.6 | R51.1 R50.2 v116.08,26.13 | IC22.2 v121.79,25.37
  Bottom 0.406: 123.06,29.3 v123.06,30.57 123.06,26.77 122.43,26.13 121.79,26.13 | v116.08,26.13 121.79,26.13 | v121.79,25.37 121.79,26.13
N$52
  Top 0.406: R44.1 133.67,23.59 137.45,23.59 CLK_LED3.C
N$53
  Top 0.406: GATE_LED3.C 133.32,30.61 R43.1
N$54
  Top 0.406: R52.1 R55.2 123.5,21.37 123.06,21.81 IC22.3
N$55
  Top 0.406: R53.1 R54.2 125.03,30.51 124.33,29.81 IC22.5
N$56
  Top 0.406: IC19.6 114.46,49.31 115.7,48.08 115.7,47.27 R56.1
  Top 0.61: IC23.1 115.57,44.61 | 115.57,44.61 118.6,44.61 C43.2 | 115.7,47.27 115.7,44.73 115.57,44.61
SCL  (via drill 0.6)
  Top 0.406: PC5.1 31.5,29.94 30.99,30.45 30.99,31.97 28.7,34.26 16.76,34.26 v16,35.02 15.49,35.53 15.49,41.88 15.75,42.13 v15.75,43.91 | v2.29,50.26 IC1.5 | IC6.1 v2.92,24.53
  Bottom 0.406: v2.29,50.26 1.91,49.88 1.91,47.72 5.71,43.91 v15.75,43.91 | v2.92,24.53 12.8,24.53 14.58,26.31 14.58,33.6 v16,35.02
SCL1  (via drill 0.6)
  Top 0.406: PC1.1 67.94,29.94 67.44,30.45 67.44,31.97 65.15,34.26 53.21,34.26 v52.45,35.02 51.94,35.53 51.94,41.88 52.2,42.13 v52.2,43.91 | v38.73,50.26 IC7.5 | IC12.1 v39.37,24.53
  Bottom 0.406: v38.73,50.26 38.35,49.88 38.35,47.72 42.16,43.91 v52.2,43.91 | v39.37,24.53 49.25,24.53 51.03,26.31 51.03,33.6 v52.45,35.02
SCL2  (via drill 0.6)
  Top 0.406: PC6.1 104.39,29.94 103.89,30.45 103.89,31.97 101.6,34.26 89.66,34.26 v88.9,35.02 88.39,35.53 88.39,41.88 88.65,42.13 v88.65,43.91 | v75.18,50.26 IC13.5 | IC18.1 v75.82,24.53
  Bottom 0.406: v75.18,50.26 74.8,49.88 74.8,47.72 78.61,43.91 v88.65,43.91 | v75.82,24.53 85.7,24.53 87.48,26.31 87.48,33.6 v88.9,35.02
SCL3  (via drill 0.6)
  Top 0.406: PC9.1 140.84,29.94 140.33,30.45 140.33,31.97 138.05,34.26 126.11,34.26 v125.35,35.02 124.84,35.53 124.84,41.88 125.09,42.13 v125.09,43.91 | v111.63,50.26 IC19.5 | IC24.1 v112.27,24.53
  Bottom 0.406: v111.63,50.26 111.25,49.88 111.25,47.72 115.06,43.91 v125.09,43.91 | v112.27,24.53 122.15,24.53 123.93,26.31 123.93,33.6 v125.35,35.02
SDA  (via drill 0.6)
  Top 0.406: PC4.1 31.5,27.4 30.23,28.67 30.23,31.59 28.32,33.5 v16.26,33.5 14.73,35.02 14.73,42.51 v14.86,42.64 | IC1.4 2.86,51.21 v2.84,51.23 | IC6.3 v2.92,22.65
  Bottom 0.406: v2.84,51.23 2.01,51.23 1.27,50.49 1.27,47.47 5.46,43.27 14.22,43.27 v14.86,42.64 | v2.92,22.65 11.89,22.65 15.24,26 15.24,33.24 15.49,33.5 v16.26,33.5
SDA1  (via drill 0.6)
  Top 0.406: PC2.1 67.94,27.4 66.68,28.67 66.68,31.59 64.77,33.5 v52.71,33.5 51.18,35.02 51.18,42.51 v51.31,42.64 | IC7.4 39.31,51.21 v39.29,51.23 | IC12.3 v39.37,22.65
  Bottom 0.406: v39.29,51.23 38.46,51.23 37.72,50.49 37.72,47.47 41.91,43.27 50.67,43.27 v51.31,42.64 | v39.37,22.65 48.34,22.65 51.69,26 51.69,33.24 51.94,33.5 v52.71,33.5
SDA2  (via drill 0.6)
  Top 0.406: PC7.1 104.39,27.4 103.12,28.67 103.12,31.59 101.22,33.5 v89.15,33.5 87.63,35.02 87.63,42.51 v87.76,42.64 | IC13.4 75.76,51.21 v75.74,51.23 | IC18.3 v75.82,22.65
  Bottom 0.406: v75.74,51.23 74.91,51.23 74.17,50.49 74.17,47.47 78.36,43.27 87.12,43.27 v87.76,42.64 | v75.82,22.65 84.78,22.65 88.14,26 88.14,33.24 88.39,33.5 v89.15,33.5
SDA3  (via drill 0.6)
  Top 0.406: PC10.1 140.84,27.4 139.57,28.67 139.57,31.59 137.67,33.5 v125.6,33.5 124.08,35.02 124.08,42.51 v124.21,42.64 | IC19.4 112.21,51.21 v112.19,51.23 | IC24.3 v112.27,22.65
  Bottom 0.406: v112.19,51.23 111.35,51.23 110.62,50.49 110.62,47.47 114.81,43.27 123.57,43.27 v124.21,42.64 | v112.27,22.65 121.23,22.65 124.59,26 124.59,33.24 124.84,33.5 v125.6,33.5

## Text on the board
tPlace: CV | CV | CV | CV | V5 | V5 | V5 | V5 | GT | GT | GT | GT | CK | CK | CK | CK | GATE | GATE | GATE | GATE | CLK | CLK | CLK | CLK
tNames: six4pix.com | six4pix.com | six4pix.com | six4pix.com | /arpie | /arpie | /arpie | /arpie
_tNames: C1 | R1 | C1 | R1 | C1 | R1 | C1 | R1 | C2 | C2 | C2 | C2 | IC2 | C3 | IC2 | C3 | IC2 | C3 | IC2 | C3 | IC1 | IC1 | IC1 | IC1 | R3 | R3 | R3 | R3 | R2 | R2 | R2 | R2 | R14 | R14 | R14 | R14 | C9 | R4 | C9 | R4 | C9 | R4 | C9 | R4 | C4 | C4 | C4 | C4 | IC5 | IC5 | IC5 | IC5 | D1 | C5 | D1 | C5 | D1 | C5 | D1 | C5 | C6 | C8 | C6 | C8 | C6 | C8 | C6 | C8 | R5 | R5 | R5 | R5 | IC3 | IC3 | IC3 | IC3 | C7 | R8 | R9 | R10 | C7 | R8 | R9 | R10 | C7 | R8 | R9 | R10 | C7 | R8 | R9 | R10 | R6 | R6 | R6 | R6 | R7 | C10 | R12 | R7 | C10 | R12 | R7 | C10 | R12 | R7 | C10 | R12 | IC4 | IC4 | IC4 | IC4 | IC6 | C12 | R13 | IC6 | C12 | R13 | IC6 | C12 | R13 | IC6 | C12 | R13 | R11 | R11 | R11 | R11